# Altium PCB MainBoard.PcbDoc
Units mm, origin at the board's own origin, x right, y up, seen from the top; angles counter-clockwise.
Board outline 66 x 21 mm, 4 copper layers (Top Layer, Layer 1, Layer 2, Bottom Layer), stack 0.603 mm thick; 4 components, 50 nets, 188 pads, 76 vias.
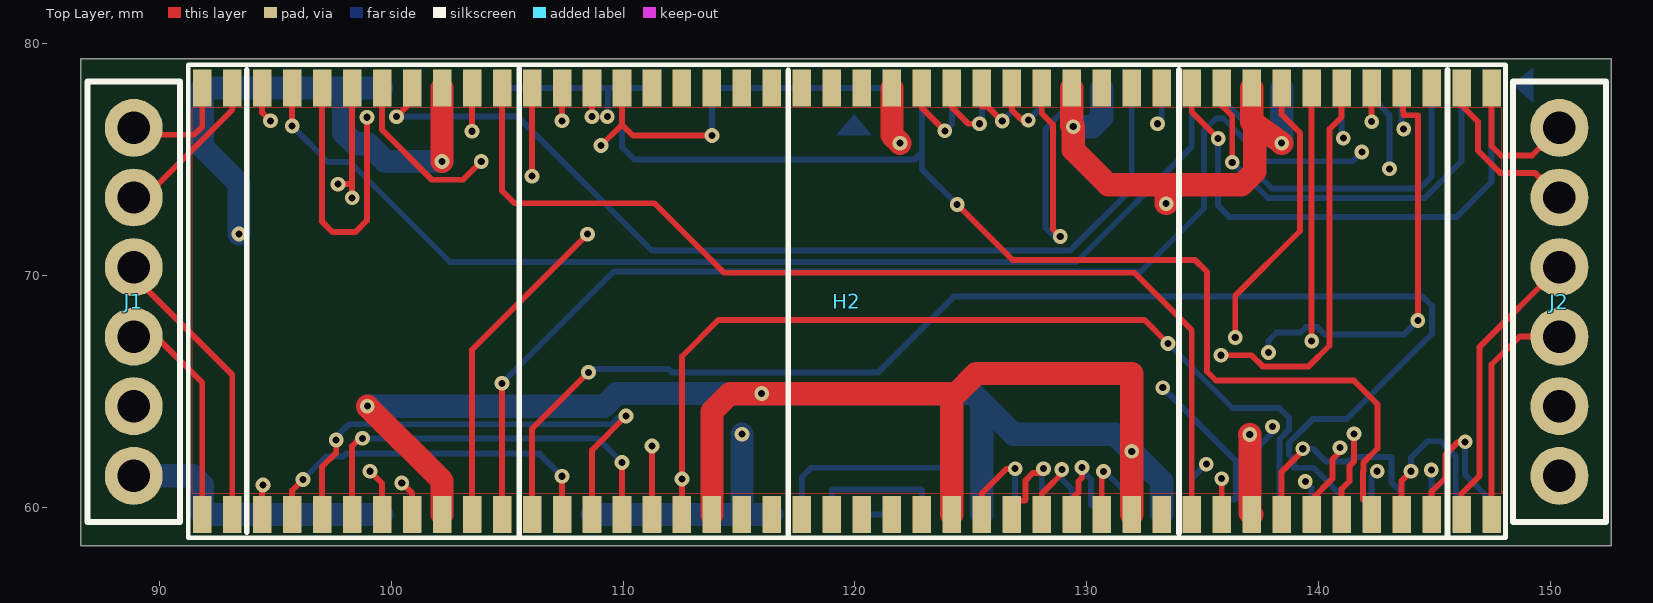
[diagram p0: Top Layer view]
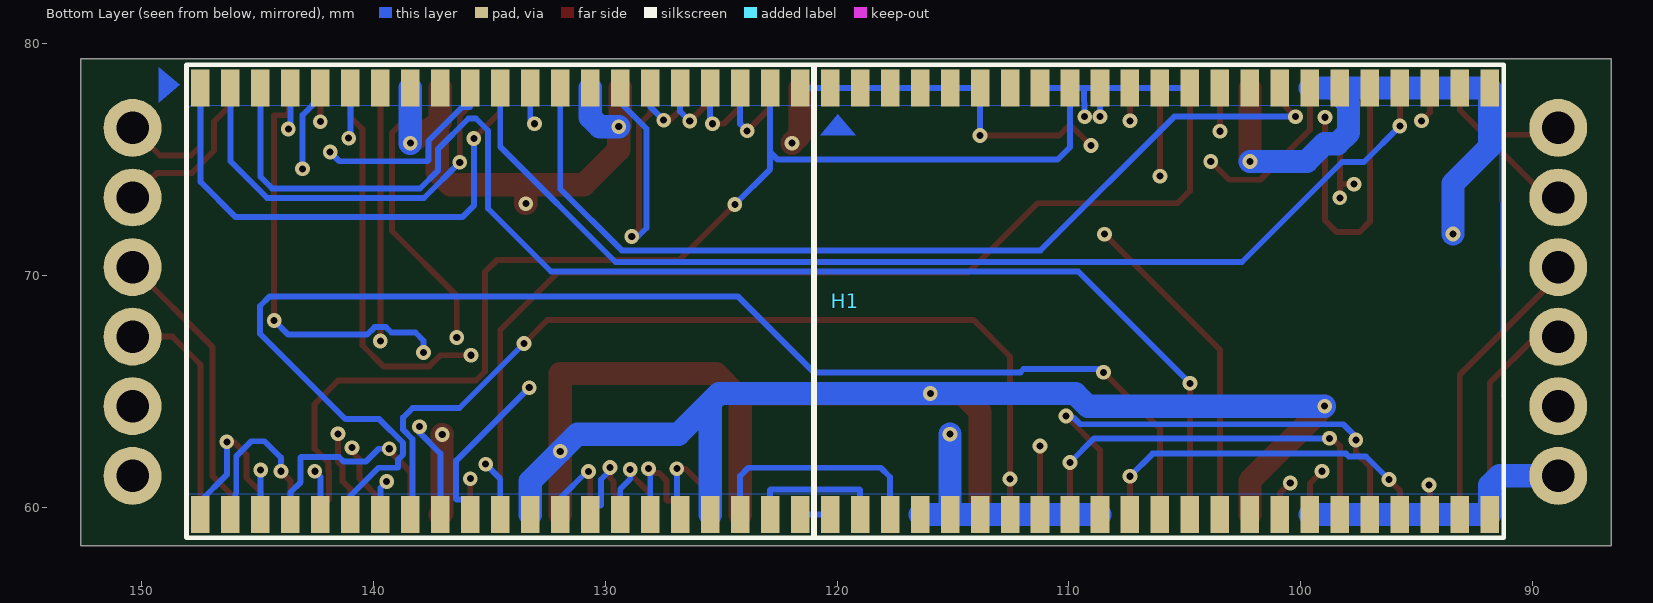
[diagram p1: Bottom Layer view, seen from below]
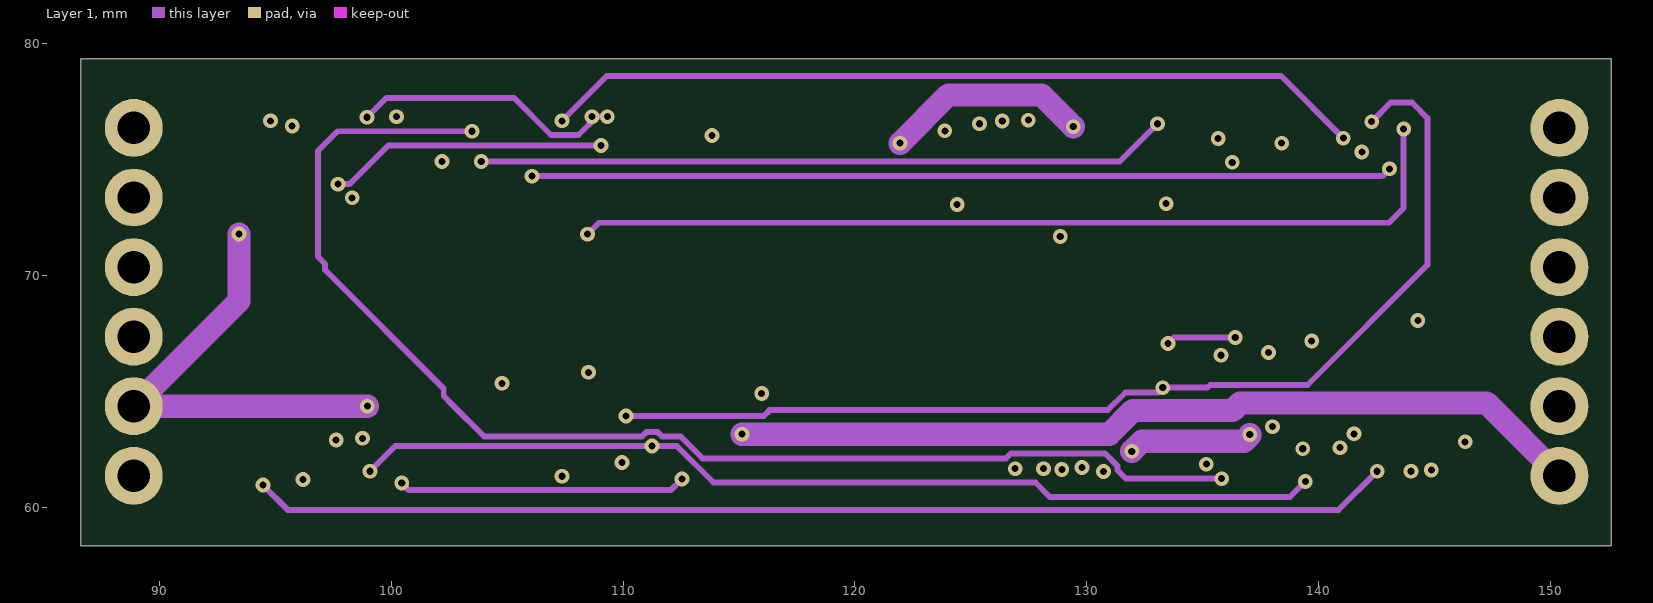
[diagram p2: Layer 1]
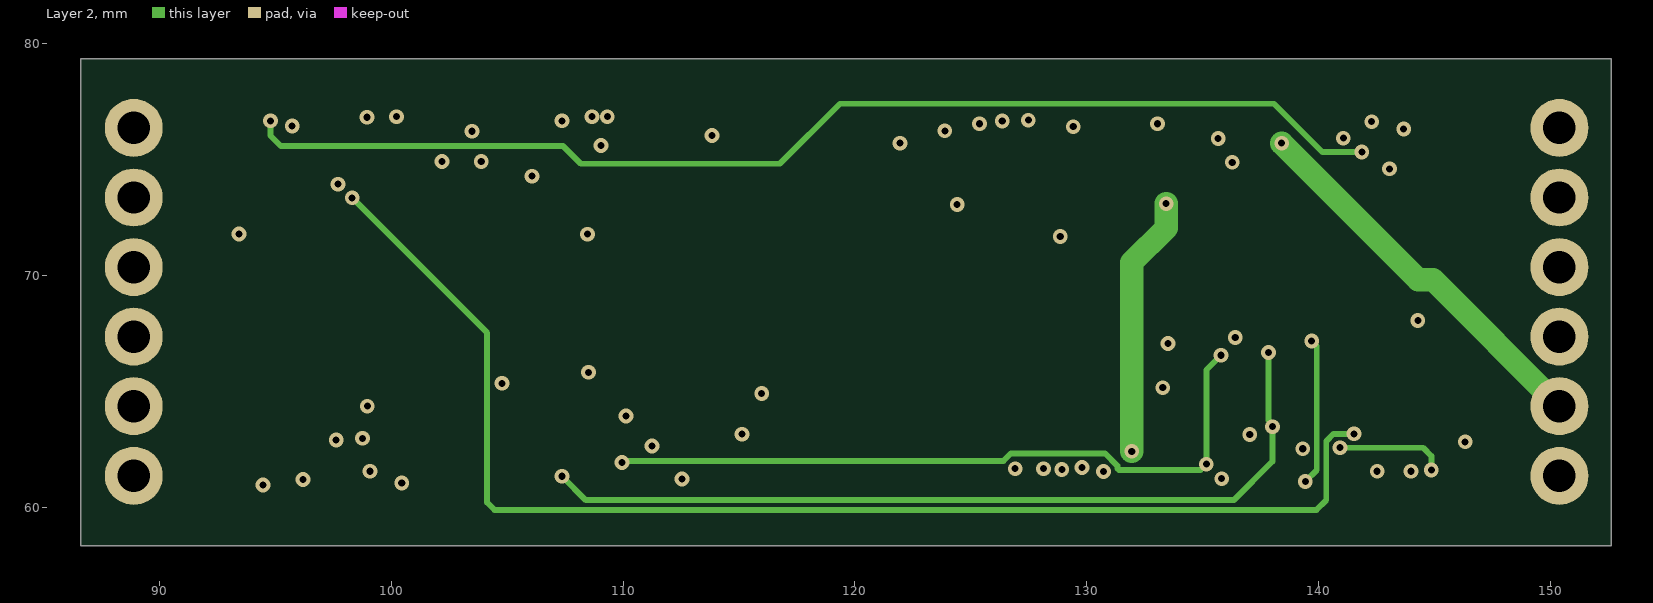
[diagram p3: Layer 2]

## Layer stack, top to bottom
Top Solder: solder mask 0.0102, Solder Resist, Dk 3.5
Top Layer: signal copper 0.0356
Dielectric 2: prepreg 0.0711, PP-006, Dk 4.1
Layer 1: signal copper 0.035
Dielectric 1: dielectric 0.32, FR-4, Dk 4.8
Layer 2: signal copper 0.035
Dielectric 3: prepreg 0.0711, PP-006, Dk 4.1
Bottom Layer: signal copper 0.0356
Bottom Solder: solder mask 0.0102, Solder Resist, Dk 3.5

## Board outline
86.614,58.359 152.614,58.359 152.614,79.359 86.614,79.359

## Design rules (kind name [scope] priority, off if disabled: settings)
AssemblyTestPointUsage SilkToBoardRegionClearance_1 [All] p2:
AssemblyTestPointUsage SilkToBoardRegionClearance [All] p3:
Clearance [All] p1: gap=0.152 ignorepadtopadclearanceinfootprint=FALSE except(0: Arc-Hole Track-Hole SMDPad-Hole THPad-Hole Via-Hole Fill-Hole Poly-Hole Region-Hole Text-Hole)
ComponentClearance [All] p1: gap=0.1 collisioncheckmode=3 verticalgap=0.1 showdistances=FALSE
HoleSize [All] p1: absolutevalues=TRUE maxlimit=6.35 minlimit=0.3 maxpercent=80.000 minpercent=20.000
MatchedLengths DiffPair_DIFF100MatchedLengths [InDifferentialPairClass('DIFF100')] p1: tolerance=0.152 checknetsindiffpair=TRUE checkdiffpairvsdiffpair=FALSE checkxsignals=FALSE checkothers=FALSE usedelayunits=FALSE
MinimumSolderMaskSliver [All] p1: minsoldermaskwidth=0.1
MinimumSolderMaskSliver SilkscreenOverComponentPads_2 [All] p2: minsoldermaskwidth=0.254
MinimumSolderMaskSliver SilkToSolderMaskClearance_1 [IsPad] p3: minsoldermaskwidth=0.254
MinimumSolderMaskSliver SilkscreenOverComponentPads_1 [All] p4: minsoldermaskwidth=0.254
MinimumSolderMaskSliver SilkToSolderMaskClearance [IsPad] p5: minsoldermaskwidth=0.254
MinimumSolderMaskSliver SilkscreenOverComponentPads [All] p6: minsoldermaskwidth=0.254
PolygonConnect [All] p1: connectstyle=Direct reliefconductorwidth=0.254 reliefentries=4 polygonreliefangle="90 Angle" airgapwidth=0.254
RoomDefinition MainBoard [InComponentClass('MainBoard')] p1: confinementstyle=ConfineIn formatcopy=TRUE lockcomponents=FALSE outline 86.61,58.36 152.62,58.36 152.62,79.36 86.61,79.36
RoutingLayers RoutingLayers_PWR [InNet('GND') or InNet('IN_VCC') or InNet('VCC1')] p1 off: top layer_v5=TRUE mid layer 1_v5=FALSE mid layer 2_v5=FALSE bottom layer_v5=TRUE
RoutingLayers [not(InNet('GND') or InNet('IN_VCC') or InNet('VCC1') )] p2: top layer_v5=TRUE mid layer 1_v5=TRUE mid layer 2_v5=TRUE bottom layer_v5=TRUE
RoutingVias [All] p1: holewidth=0.305 width=0.635 viastyle="Through Hole" minholewidth=0.305 minwidth=0.635 maxholewidth=0.711 maxwidth=1.27
SilkToBoardRegionClearance SilkToBoardRegionClearance_2 [All] p1:
SilkToSolderMaskClearance SilkToSolderMaskClearance_2 [IsPad] p1: minsilkscreentomaskgap=0.254 clearancetoexposedcopper=TRUE
SolderMaskExpansion [All] p1: expansion=0.102
Width Width_PWR [(InNet('GND') or InNet('VCC1')  or InNet('IN_VCC'))] p1: maxlimit=2 minlimit=0.8 preferedwidth=1 minimp=50.000000 maximp=50.000000 favimp=50.000000
Width [All] p2: maxlimit=2.54 minlimit=0.152 preferedwidth=0.254
24 further rules are at their usual default settings.

## Components (designator, comment, footprint, x,y, rotation, side; value= is the part's Value field where it differs from the comment)
H1 "MB 88 pin" "MB 88 pins" 147.852,58.9 r180 bottom
H2 "MB 88 pin" "MB 88 pins" 147.852,78.9 r180 top
J1 "Cyclops_connector" CYCLOPS-1LINE 171.9,53.375 r90 top
J2 "Cyclops_connector" CYCLOPS-1LINE 233.38,53.375 r90 top

## Footprints (in the part's own frame and the unit in brackets; to place one, negate y for a bottom-side part, rotate by r counter-clockwise, add the part's x,y. Pads: shape width x height; smd on the part's side, far side on the other; paste and mask are expansions set on the pad)
CYCLOPS-1LINE [mm]
  round 2.5 hole 1.4: 1(8,83) 2(11,83) 3(14,83) 4(17,83) 5(20,83) 6(23,83)
  silkscreen extent 6,81 25,85
"MB 88 pins" [mm]
  rect 0.8x1.6 smd: 1(56,19.2) 2(54.707,19.2) 3(53.414,19.2) 4(52.121,19.2) 5(50.828,19.2) 6(49.535,19.2) 7(48.242,19.2) 8(46.949,19.2) 9(45.656,19.2) 10(44.363,19.2) 11(43.07,19.2) 12(41.777,19.2) 13(40.484,19.2) 14(39.191,19.2) 15(37.898,19.2) 16(36.605,19.2) 17(35.312,19.2) 18(34.019,19.2) 19(32.726,19.2) 20(31.433,19.2) 21(30.14,19.2) 22(28.847,19.2) 23(27.553,19.2) 24(26.26,19.2) 25(24.967,19.2) 26(23.674,19.2) 27(22.381,19.2) 28(21.088,19.2) 29(19.795,19.2) 30(18.502,19.2) 31(17.209,19.2) 32(15.916,19.2) 33(14.623,19.2) 34(13.33,19.2) 35(12.037,19.2) 36(10.744,19.2) 37(9.451,19.2) 38(8.158,19.2) 39(6.865,19.2) 40(5.572,19.2) 41(4.279,19.2) 42(2.986,19.2) 43(1.693,19.2) 44(0.4,19.2) 45(0.4,0.8) 46(1.693,0.8) 47(2.986,0.8) 48(4.279,0.8) 49(5.572,0.8) 50(6.865,0.8) 51(8.158,0.8) 52(9.451,0.8) 53(10.744,0.8) 54(12.037,0.8) 55(13.33,0.8) 56(14.623,0.8) 57(15.916,0.8) 58(17.209,0.8) 59(18.502,0.8) 60(19.795,0.8) 61(21.088,0.8) 62(22.381,0.8) 63(23.674,0.8) 64(24.967,0.8) 65(26.26,0.8) 66(27.553,0.8) 67(28.847,0.8) 68(30.14,0.8) 69(31.433,0.8) 70(32.726,0.8) 71(34.019,0.8) 72(35.312,0.8) 73(36.605,0.8) 74(37.898,0.8) 75(39.191,0.8) 76(40.484,0.8) 77(41.777,0.8) 78(43.07,0.8) 79(44.363,0.8) 80(45.656,0.8) 81(46.949,0.8) 82(48.242,0.8) 83(49.535,0.8) 84(50.828,0.8) 85(52.121,0.8) 86(53.414,0.8) 87(54.707,0.8) 88(56,0.8)
  silkscreen extent -0.2,-0.2 56.6,20.2

## Via types
v1: diameter 0.635, hole 0.305, Top Layer to Bottom Layer, tented both sides, 76 vias

## Nets (pads, with @x,y where several pads share a name; then routed paths per layer and width w, separated by ;. In a path a pad name is that pad's centre, name@x,y a point inside that pad or via, vN(x,y) a via of type N, cw(c..) or ccw(c..) an arc to the next point about the centre after c; other vN are vias at no path point)
ADC1: H1.48 H2.37 | length 10
  Top Layer w0.254: H2.37 138.401,61.544 139.31,62.453 v1(139.31,62.54)
  Bottom Layer w0.254: v1(139.31,62.54) 139.765,62.54 140.32,61.985 141.271,61.985 141.473,62.187 143.104,62.187 143.129,62.162 143.129,61.099 143.573,60.655 H1.48
ADC2: H1.47 H2.38 | length 10
  Top Layer w0.254: H2.38 139.694,60.35 140.589,61.245 140.589,62.078 140.919,62.408 v1(140.919,62.586)
  Layer 2 w0.254: v1(140.919,62.586) 144.501,62.586 144.856,62.23 v1(144.856,61.62)
  Bottom Layer w0.254: v1(144.856,61.62) 144.866,61.61 H1.47
ADC3: H1.32 H2.81 | length 41
  Top Layer w0.254: v1(100.228,76.86) 100.66,77.292 H2.81
  Bottom Layer w0.254: v1(100.228,76.86) 105.461,76.86 111.227,71.095 129.286,71.095 131.936,73.745 H1.32
ADC4: H1.33 H2.82 | length 38.8
  Top Layer w0.254: H2.82 99.61,76.285 101.752,74.143 103.099,74.143 v1(103.886,74.93)
  Layer 1 w0.254: v1(103.886,74.93) 131.42,74.93 v1(133.045,76.556)
  Bottom Layer w0.254: v1(133.045,76.556) 133.229,76.739 H1.33
D1-1: H1.41 H2.10 | length 55
  Top Layer w0.254: H2.10 103.49,66.812 v1(108.471,71.793)
  Layer 1 w0.254: v1(108.471,71.793) 108.966,72.288 143.027,72.288 143.662,72.923 v1(143.662,76.327)
  Bottom Layer w0.254: H1.41 143.573,76.416 v1(143.662,76.327)
D1-2: H1.42 H2.11 | length 58.3
  Top Layer w0.254: H2.11 v1(104.783,65.362)
  Bottom Layer w0.254: v1(104.783,65.362) 109.601,70.18 132.334,70.18 135.052,72.898 135.052,76.263 135.572,76.784 135.89,76.784 137.215,75.459 137.215,74.532 137.985,73.762 144.358,73.762 144.866,74.27 H1.42
D2-1: H1.43 H2.54 | length 17.7
  Top Layer w0.254: H2.54 135.815,77.343 136.271,76.887 v1(136.271,74.894)
  Bottom Layer w0.254: v1(136.271,74.894) 137.81,73.355 144.577,73.355 146.159,74.938 H1.43
D2-2: H1.44 H2.55 | length 22.2
  Top Layer w0.254: H2.55 134.522,77.06 v1(135.661,75.921)
  Bottom Layer w0.254: v1(135.661,75.921) 135.661,73.025 136.144,72.542 145.946,72.542 147.452,74.049 H1.44
ETH1_1: H1.61 H2.27 | length 4.8
  Top Layer w0.254: H2.27 125.471,60.612 126.539,61.68 v1(126.91,61.68)
  Bottom Layer w0.254: H1.61 126.91,59.846 v1(126.91,61.68)
ETH1_2: H1.60 H2.28 | length 5.1
  Top Layer w0.254: H2.28 126.764,60.3 127.33,60.3 127.361,60.33 127.361,61.181 127.673,61.493 128.093,61.493 128.13,61.53 128.13,61.58 128.18,61.58 v1@128.167,61.568
  Bottom Layer w0.254: H1.60 128.057,61.425 128.212,61.58 v1@128.13,61.58
  other v1: 128.13,61.68
ETH1_3: H1.59 H2.29 | length 4.7
  Top Layer w0.254: H2.29 128.057,60.604 129.102,61.65 v1(128.92,61.65)
  Bottom Layer w0.254: v1(128.92,61.65) 128.92,61.234 129.35,60.804 H1.59
ETH1_4: H1.58 H2.30 | length 4.9
  Top Layer w0.254: H2.30 129.35,60.376 129.632,60.658 129.632,61.13 129.63,61.13 129.79,61.29 v1(129.79,61.73)
  Bottom Layer w0.254: v1(129.79,61.73) 129.79,61.601 130.175,61.216 130.175,60.122 130.2,60.096 130.643,60.096 H1.58
ETH1_5: H1.57 H2.31 | length 4.4
  Top Layer w0.254: H2.31 130.643,61.493 130.668,61.519 130.772,61.519 130.731,61.56 v1(130.72,61.56)
  Bottom Layer w0.254: v1(130.72,61.56) 130.782,61.56 131.936,60.405 H1.57
ETH1_6: H1.26 H2.64 | length 4.2
  Top Layer w0.254: H2.64 122.885,77.242 v1(123.876,76.251)
  Bottom Layer w0.254: v1(123.876,76.251) 124.178,76.553 H1.26
ETH1_7: H1.27 H2.63 | length 3.9
  Top Layer w0.254: H2.63 124.178,77.267 124.889,76.556 v1(125.374,76.556)
  Bottom Layer w0.254: v1(125.374,76.556) 125.471,76.652 H1.27
ETH1_8: H1.28 H2.62 | length 3.5
  Top Layer w0.254: H2.62 125.471,77.292 125.73,77.292 v1(126.352,76.67)
  Bottom Layer w0.254: v1(126.352,76.67) 126.764,77.082 H1.28
ETH1_9: H1.29 H2.61 | length 3.5
  Top Layer w0.254: H2.61 126.764,77.153 127.208,76.708 v1(127.477,76.708)
  Bottom Layer w0.254: v1(127.477,76.708) 128.057,77.288 H1.29
ETH1_10: H1.30 H2.60 | length 14
  Top Layer w0.254: H2.60 128.057,76.997 128.537,76.517 128.537,72.009 v1(128.854,71.691)
  Bottom Layer w0.254: v1(128.854,71.691) 128.588,71.691 128.219,72.06 128.219,76.339 129.35,77.47 H1.30
GLIDER_P1: H2.1 J1.3 | length 9.5
  Top Layer w0.254: J1.3 89.875,67.375 91.852,65.398 H2.1
GLIDER_P2: H2.2 J1.4 | length 12.4
  Top Layer w0.254: J1.4 88.9,69.98 93.145,65.735 H2.2
GLIDER_P3: H2.87 J1.5 | length 6.8
  Top Layer w0.254: J1.5 89.37,73.375 93.145,77.151 H2.87
GLIDER_P4: H2.88 J1.6 | length 4.9
  Top Layer w0.254: J1.6 89.195,76.08 91.5,76.08 91.852,76.432 H2.88
GND: H1.1 H1.2 H1.3 H1.4 H1.5 H1.6 H1.7 H1.31 H1.37 H1.56 H1.62 H2.9 H2.18 H2.26 H2.32 H2.36 H2.53 H2.59 H2.65 H2.80 J1.2 J2.2 | length 197.9
  Top Layer w1: v1(98.975,64.375) 102.197,61.153 H2.9 ; v1(102.197,74.93) H2.80 ; H2.18 113.834,64.135 114.609,64.91 124.359,64.91 ; H2.65 121.592,76.071 v1(121.945,75.717) ; H2.26 124.178,64.729 ; 124.178,64.82 124.178,64.729 ; H2.59 129.35,76.492 v1(129.413,76.429) 129.413,75.437 130.926,73.924 133.41,73.924 ; H2.32 v1(131.936,62.429) 131.936,65.786 125.234,65.786 124.359,64.91 ; v1(133.42,73.11) 133.42,73.914 133.41,73.924 ; v1(137.026,63.16) 137.031,63.155 137.031,59.777 H2.36 ; H2.53 137.108,76.646 ; v1(138.401,75.717) 137.108,76.646 ; 124.178,64.729 124.359,64.91 ; 133.41,73.924 136.673,73.924 137.241,74.492 137.241,76.513 137.108,76.646
  Layer 1 w1: v1(93.44,71.8) 93.44,68.915 J1.2 v1(98.975,64.375) ; v1(121.945,75.717) 124.028,77.8 128.041,77.8 v1(129.413,76.429) ; v1(131.936,62.429) 132.372,62.865 136.779,62.865 137.026,63.112 v1(137.026,63.16)
  Layer 2 w1: v1(131.936,62.429) 131.936,70.574 133.42,72.058 v1(133.42,73.11) ; v1(138.401,75.717) 144.294,69.825 144.93,69.825 J2.2
  Bottom Layer w1: v1(93.44,71.8) 93.44,73.977 91.852,75.565 H1.1 H1.2 H1.3 H1.4 H1.5 H1.6 ; v1(98.975,64.375) 109.183,64.375 109.727,64.919 125.091,64.919 125.471,64.539 ; H1.7 H1.6 ; v1(102.197,74.93) 99.742,74.93 98.983,75.689 98.425,75.689 97.944,76.17 97.944,77.427 98.317,77.8 H1.6 ; H1.62 125.471,64.539 ; v1(129.413,76.429) 130.237,76.429 130.643,76.835 H1.31 ; H1.56 133.229,61.136 v1(131.936,62.429) 131.195,63.17 126.84,63.17 125.471,64.539 ; v1(138.401,75.717) H1.37
  other v1: 115.976,64.919
I2C1_CLK: H1.51 H2.7 H2.16 H2.51 | length 65.8
  Top Layer w0.254: v1(99.085,61.57) 99.61,61.045 H2.7 ; H2.16 v1(111.248,62.662) ; v1(139.694,67.189) H2.51
  Layer 1 w0.254: v1(99.085,61.57) 100.178,62.662 v1(111.248,62.662) 112.319,62.662 113.897,61.083 127.783,61.083 128.405,60.461 138.756,60.461 v1(139.421,61.125)
  Layer 2 w0.254: v1(139.421,61.125) 139.914,61.618 139.914,66.969 v1(139.694,67.189)
  Bottom Layer w0.254: v1(139.421,61.125) 139.694,60.852 H1.51
I2C1_SDA: H1.52 H2.8 H2.17 H2.52 | length 69
  Top Layer w0.254: v1(100.457,61.062) 100.903,60.615 H2.8 ; H2.17 v1(112.541,61.239) 112.541,66.523 114.115,68.097 132.483,68.097 v1(133.499,67.081) ; v1(136.398,67.335) 136.398,69.139 139.192,71.933 139.192,76.162 138.401,76.953 H2.52
  Layer 1 w0.254: v1(100.457,61.062) 100.762,60.757 112.058,60.757 v1(112.541,61.239) ; v1(133.499,67.081) 133.753,67.335 v1(136.398,67.335)
  Bottom Layer w0.254: v1(133.499,67.081) 136.28,64.3 138.3,64.3 138.71,63.89 138.71,63.359 138.306,62.955 138.306,59.795 H1.52
IN_VCC: H1.82 H1.83 H1.84 H1.85 H1.86 H1.87 H1.88 J1.1 | length 12.1
  Bottom Layer w1: J1.1 91.44,61.375 91.852,60.963 H1.88 H1.87 H1.86 H1.85 H1.84 H1.83 H1.82
PTP1: H2.34 H2.78 | length 44.6
  Top Layer w0.254: H2.78 104.783,73.66 105.316,73.127 111.354,73.127 114.351,70.129 132.055,70.129 134.522,67.662 H2.34
PTP2: H2.35 H2.79 | length 58.7
  Top Layer w0.254: v1(103.49,76.233) H2.79 ; H2.35 v1(135.815,61.252)
  Layer 1 w0.254: v1(103.49,76.233) 97.688,76.233 96.837,75.382 96.837,70.828 97.155,70.51 97.155,70.245 102.267,65.133 102.267,64.813 102.64,64.44 104.012,63.068 110.81,63.068 111,63.259 111.495,63.259 111.685,63.068 112.487,63.068 113.427,62.128 126.514,62.128 126.723,62.337 130.787,62.337 131.317,61.807 131.317,61.621 131.686,61.252 v1(135.815,61.252)
PWR1: H1.63 H1.68 | length 10.1
  Bottom Layer w0.254: H1.68 117.713,61.325 118.11,61.722 123.825,61.722 124.178,61.369 H1.63
PWR2: H1.64 H1.67 | length 6
  Bottom Layer w0.254: H1.67 119.006,60.757 119.031,60.782 122.859,60.782 122.885,60.757 H1.64
PWR3: H1.65 H1.66 | length 1.3
  Bottom Layer w0.254: H1.66 H1.65
SENSOR_P1: H2.44 J2.3 | length 9.9
  Top Layer w0.254: H2.44 147.452,66.172 148.655,67.375 J2.3
SENSOR_P2: H2.43 J2.4 | length 12.4
  Top Layer w0.254: H2.43 146.159,60.599 146.94,61.38 146.94,66.935 J2.4
SENSOR_P3: H2.46 J2.5 | length 7.3
  Top Layer w0.254: H2.46 146.159,77.351 146.87,76.64 146.87,75.39 147.82,74.44 149.315,74.44 J2.5
SENSOR_P4: H2.45 J2.6 | length 6.1
  Top Layer w0.254: H2.45 147.452,75.598 147.86,75.19 149.195,75.19 J2.6
SPI1_CL: H1.53 H2.4 H2.13 H2.48 | length 74.3
  Top Layer w0.254: H2.4 95.731,60.743 v1(96.203,61.215) ; H2.13 v1(107.369,61.354) ; H2.48 143.649,76.937 144.272,76.911 v1(144.272,68.072)
  Layer 2 w0.254: v1(107.369,61.354) 108.397,60.325 136.337,60.325 138.001,61.989 v1(138.001,63.495) 138.001,63.598 137.83,63.769 v1(137.83,66.69)
  Bottom Layer w0.254: v1(96.203,61.215) 97.193,62.205 97.934,62.205 98.06,62.33 106.392,62.33 v1(107.369,61.354) ; H1.53 137.108,62.332 138.001,63.225 v1(138.001,63.495) ; v1(137.83,66.69) 137.83,67.2 138.18,67.55 139.211,67.55 139.447,67.786 139.941,67.786 140.266,67.461 143.661,67.461 v1(144.272,68.072)
SPI1_MI: H1.55 H2.6 H2.15 H2.50 | length 67.2
  Top Layer w0.254: H2.6 98.317,62.656 98.651,62.99 v1(98.76,62.99) ; H2.15 109.955,61.949 v1(109.957,61.951) ; v1(135.788,66.573) 137.102,66.573 137.583,66.093 139.563,66.093 140.462,66.992 140.462,76.322 140.987,76.848 H2.50
  Layer 2 w0.254: v1(109.957,61.951) 110.023,62.017 126.403,62.017 126.723,62.337 130.787,62.337 131.317,61.807 131.317,61.698 131.394,61.62 134.899,61.62 v1(135.153,61.874) 135.153,65.938 v1(135.788,66.573)
  Bottom Layer w0.254: v1(98.76,62.99) 108.917,62.99 v1(109.957,61.951) ; H1.55 134.522,61.243 v1(135.153,61.874)
SPI1_MO: H1.54 H2.5 H2.14 H2.49 | length 77.3
  Top Layer w0.254: H2.5 97.024,61.755 97.02,61.759 97.63,62.369 v1(97.63,62.92) ; H2.14 108.662,62.482 v1(110.129,63.949) ; v1(142.28,76.647) H2.49
  Layer 1 w0.254: v1(110.129,63.949) 116.069,63.949 116.325,64.205 116.32,64.21 130.904,64.21 131.663,64.969 133.066,64.969 v1(133.274,65.176) 135.202,65.176 135.32,65.294 139.513,65.294 144.691,70.472 144.691,76.797 144.018,77.47 143.104,77.47 v1(142.28,76.647)
  Bottom Layer w0.254: v1(97.63,62.92) 97.63,62.717 97.459,62.889 98.166,63.596 109.506,63.596 109.787,63.876 110.056,63.876 v1(110.129,63.949) ; v1(133.274,65.176) 136.423,62.027 136.423,60.376 136.398,60.35 135.815,60.35 H1.54
SPI1_SS1: H2.47
SPI1_SS2: H1.49 H2.3 | length 52.4
  Top Layer w0.254: H2.3 94.438,60.936 v1(94.475,60.973)
  Layer 1 w0.254: v1(94.475,60.973) 95.542,59.906 140.856,59.906 v1(142.519,61.57)
  Bottom Layer w0.254: H1.49 142.28,61.33 v1(142.519,61.57)
SPI1_SS3: H1.50 H2.12 | length 59
  Top Layer w0.254: H2.12 106.076,63.404 v1(108.509,65.837)
  Bottom Layer w0.254: v1(108.509,65.837) 108.649,65.977 111.957,65.977 112.097,65.837 121.006,65.837 124.282,69.113 144.463,69.113 144.882,68.694 144.882,67.501 141.199,63.817 139.743,63.817 138.713,62.787 138.713,62.293 138.935,62.071 138.935,61.74 139.77,61.722 140.987,60.505 H1.50
UART1_1: H1.46 H2.41 | length 7.7
  Top Layer w0.254: H2.41 143.573,61.163 v1(143.98,61.57)
  Bottom Layer w0.254: v1(143.98,61.57) 143.98,62.157 144.688,62.865 145.26,62.865 145.909,62.216 145.909,60.634 145.93,60.612 H1.46
UART1_2: H1.45 H2.42 | length 7.5
  Top Layer w0.254: H2.42 144.866,60.681 145.466,61.28 145.466,62.286 146.02,62.84 v1(146.315,62.84)
  Bottom Layer w0.254: v1(146.315,62.84) 146.315,61.425 147.452,60.288 H1.45
UART2_1: H1.34 H2.85 | length 47.5
  Top Layer w0.254: v1(95.731,76.454) H2.85
  Bottom Layer w0.254: v1(95.731,76.454) 97.279,74.906 98.224,74.906 102.538,70.593 129.55,70.593 134.522,75.565 H1.34
UART2_2: H1.35 H2.86 | length 60.2
  Top Layer w0.254: H2.86 94.438,77.037 v1(94.793,76.683)
  Layer 2 w0.254: v1(94.793,76.683) 94.793,76.048 95.25,75.59 107.417,75.59 108.179,74.828 116.764,74.828 119.355,77.419 138.074,77.419 140.157,75.336 v1(141.859,75.336)
  Bottom Layer w0.254: H1.35 135.815,77.292 135.841,77.267 136.169,77.267 137.622,75.814 137.622,74.981 137.665,74.938 141.461,74.938 v1(141.859,75.336)
UART3_1: H1.39 H2.76 | length 39.2
  Top Layer w0.254: v1(107.369,76.683) H2.76
  Layer 1 w0.254: v1(107.369,76.683) 109.299,78.613 138.379,78.613 v1(141.059,75.933)
  Bottom Layer w0.254: H1.39 140.987,76.005 v1(141.059,75.933)
UART3_2: H1.40 H2.77 | length 44.7
  Top Layer w0.254: v1(106.076,74.295) H2.77
  Layer 1 w0.254: v1(106.076,74.295) 142.735,74.295 v1(143.053,74.612)
  Bottom Layer w0.254: H1.40 142.28,77.699 143.053,76.926 v1(143.053,74.612)
VCC1: H1.69 H1.70 H1.71 H1.72 H1.73 H1.74 H1.75 J2.1 | length 48.3
  Layer 1 w1: v1(115.127,63.17) 130.966,63.17 131.986,64.189 136.282,64.189 136.607,64.514 147.241,64.514 J2.1
  Bottom Layer w1: H1.75 H1.74 H1.73 H1.72 H1.71 H1.70 ; v1(115.127,63.17) H1.70 ; H1.69 H1.70
VCC2: H1.18 H1.19 H1.20 H1.21 H1.22 H1.23 H1.24 H2.39 H2.74 H2.83 | length 93.8
  Top Layer w0.254: v1(97.71,73.95) 98.207,73.95 98.317,74.06 ; v1(98.317,73.361) 98.317,74.06 ; H2.83 98.317,74.06 ; v1(109.053,75.616) 109.955,76.517 ; H2.74 109.955,76.517 ; v1(113.834,76.048) 110.425,76.048 109.955,76.517 ; H2.39 140.987,60.802 141.324,61.139 141.324,61.792 141.516,61.985 v1(141.516,63.182)
  Layer 1 w0.254: v1(97.71,73.95) 98.207,73.95 99.873,75.616 v1(109.053,75.616)
  Layer 2 w0.254: v1(98.317,73.361) 104.14,67.539 104.14,60.223 104.457,59.906 139.903,59.906 140.322,60.325 140.322,62.865 140.64,63.182 v1(141.516,63.182)
  Bottom Layer w0.254: v1(113.834,76.048) H1.18 H1.19 H1.20 H1.21 H1.22 H1.23 H1.24
VCC3: H1.11 H1.12 H1.13 H1.14 H1.15 H1.16 H1.25 H2.40 H2.75 H2.84 | length 85.5
  Top Layer w0.254: H2.84 97.024,72.33 97.472,71.882 98.45,71.882 98.958,72.39 v1(98.958,76.835) ; v1(108.662,76.86) H2.75 ; v1(124.409,73.075) 126.796,70.688 134.658,70.688 135.179,70.168 135.179,65.875 135.572,65.481 141.516,65.481 142.537,64.461 142.537,62.547 141.922,61.933 141.922,61.578 141.91,61.566 141.91,60.35 142.28,60.35 H2.40
  Layer 1 w0.254: v1(98.958,76.835) 99.797,77.673 105.296,77.673 106.896,76.073 108.077,76.073 108.864,76.86 v1(109.322,76.86)
  Bottom Layer w0.254: H1.11 H1.12 H1.13 H1.14 ; v1(108.662,76.86) H1.14 ; v1(109.322,76.86) 109.347,78.1 ; H1.16 H1.15 ; H1.25 122.885,75.336 ; v1(124.409,73.075) 122.885,74.6 122.885,75.336 ; H1.14 109.347,78.1 ; 109.347,78.1 H1.15 ; H1.15 109.955,75.542 110.49,75.006 122.555,75.006 122.885,75.336
pads on no net: H1.8 H1.9 H1.10 H1.17 H1.36 H1.38 H1.76 H1.77 H1.78 H1.79 H1.80 H1.81 H2.19 H2.20 H2.21 H2.22 H2.23 H2.24 H2.25 H2.33 H2.56 H2.57 H2.58 H2.66 H2.67 H2.68 H2.69 H2.70 H2.71 H2.72 H2.73

## Polygon pours and split planes (outlines as drawn)
GND on Top Layer "NONET_L01_P008" (solid, shelved, pour order 8): 91.425,77.275 147.875,77.275 147.875,60.725 148,60.6 91.425,60.6
GND on Bottom Layer "NONET_L04_P010" (solid, shelved, pour order 10): 91.425,77.325 147.875,77.325 148.1,77.1 148.1,60.6 91.3,60.6

## Other copper
Bottom Layer:
  region net SENSOR_P3: 148.351,78.23 149.24,77.468 149.24,78.992
  region: 119.96,76.959 119.198,76.07 120.722,76.07

## Silkscreen, mask and mechanical layers (free items; w line width, h text height)
Top Overlay:
  lines w0.254: 93.775,58.95 93.775,78.875 ; 105.525,58.85 105.525,78.925 ; 117.125,58.775 117.125,78.85 ; 133.975,58.9 133.975,78.875 ; 145.55,58.825 145.55,78.875
Bottom Overlay:
  lines w0.254: 121,58.725 121,79.05
Mechanical 1:
  lines w0.254: 152.614,79.3 152.614,58.359 86.614,58.359 86.614,79.359 152.614,79.359